# Altium PCB Copy of EVB_gate driver_components.PcbDoc
Units mil, origin at the board's own origin, x right, y up, seen from the top; angles counter-clockwise.
Board outline 1180 x 1310 mil, 2 copper layers (Top Layer, Bottom Layer); 26 components, 19 nets, 81 pads, 0 vias.
Unrouted connection lines stored in the file: 57.
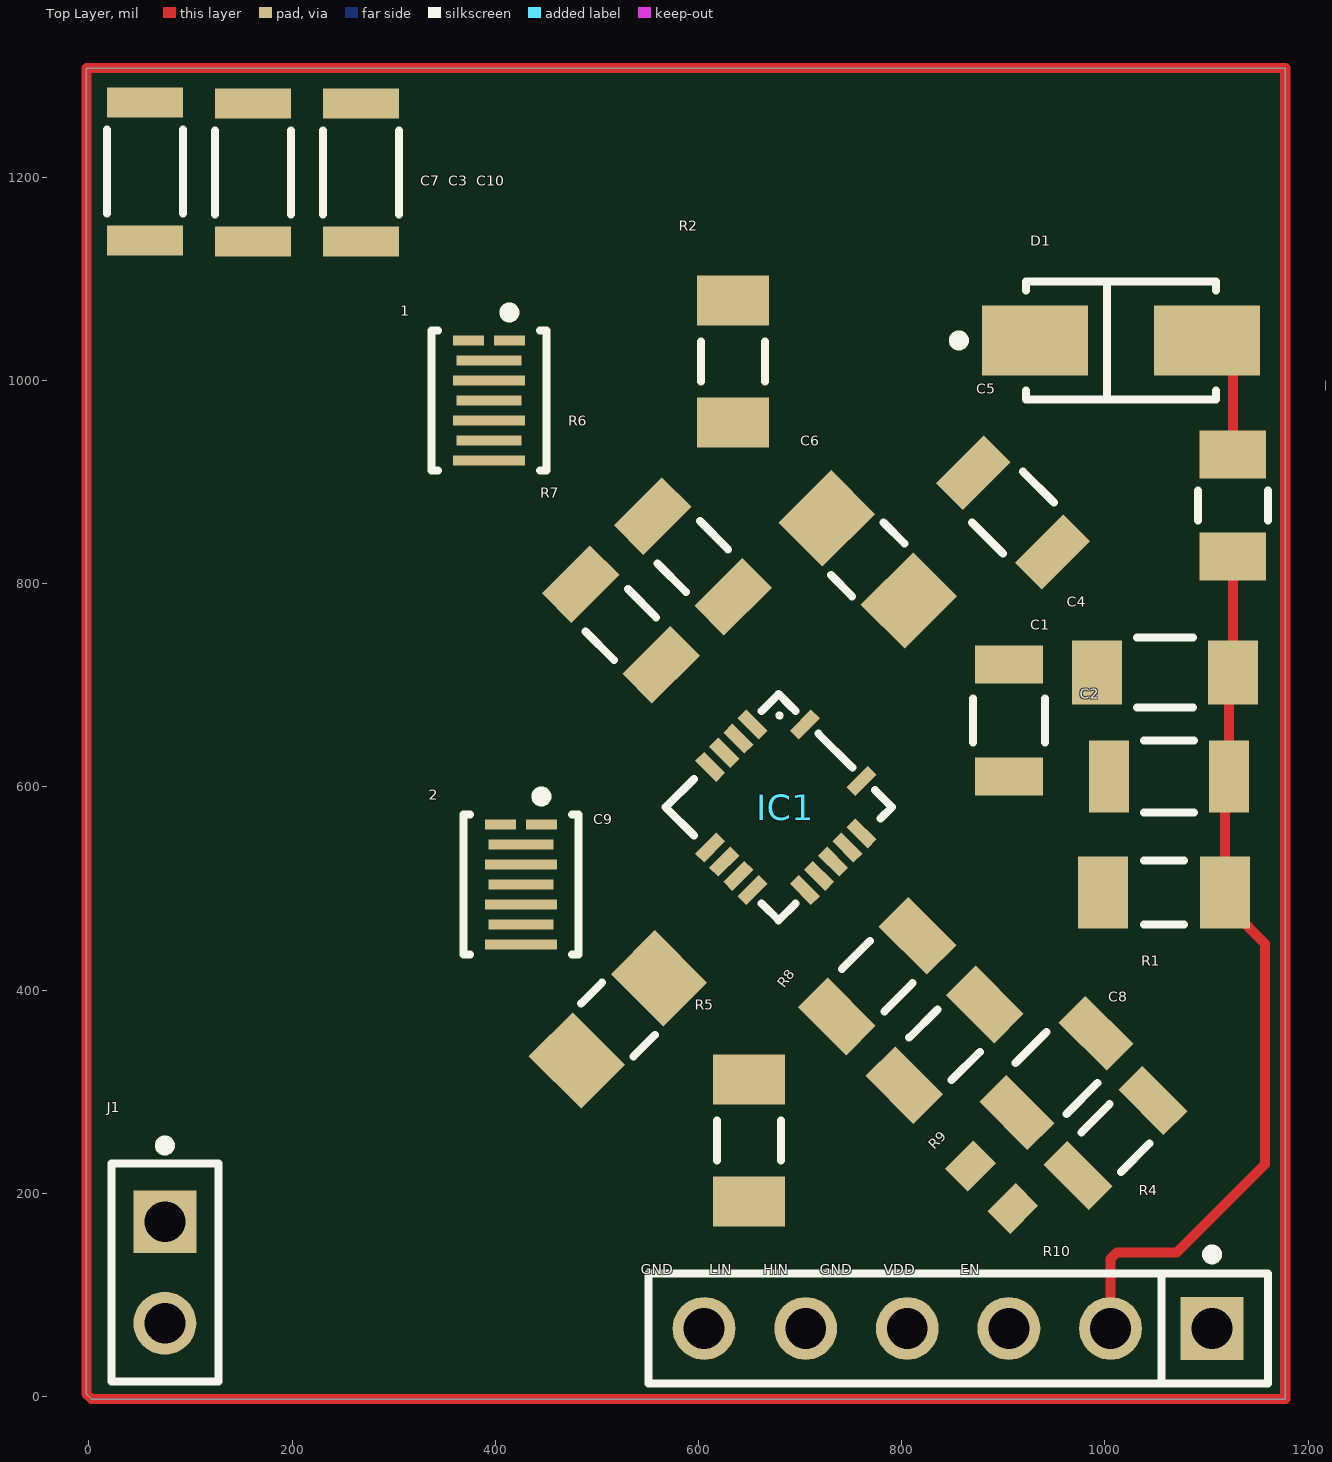
[diagram p0: Top Layer view]
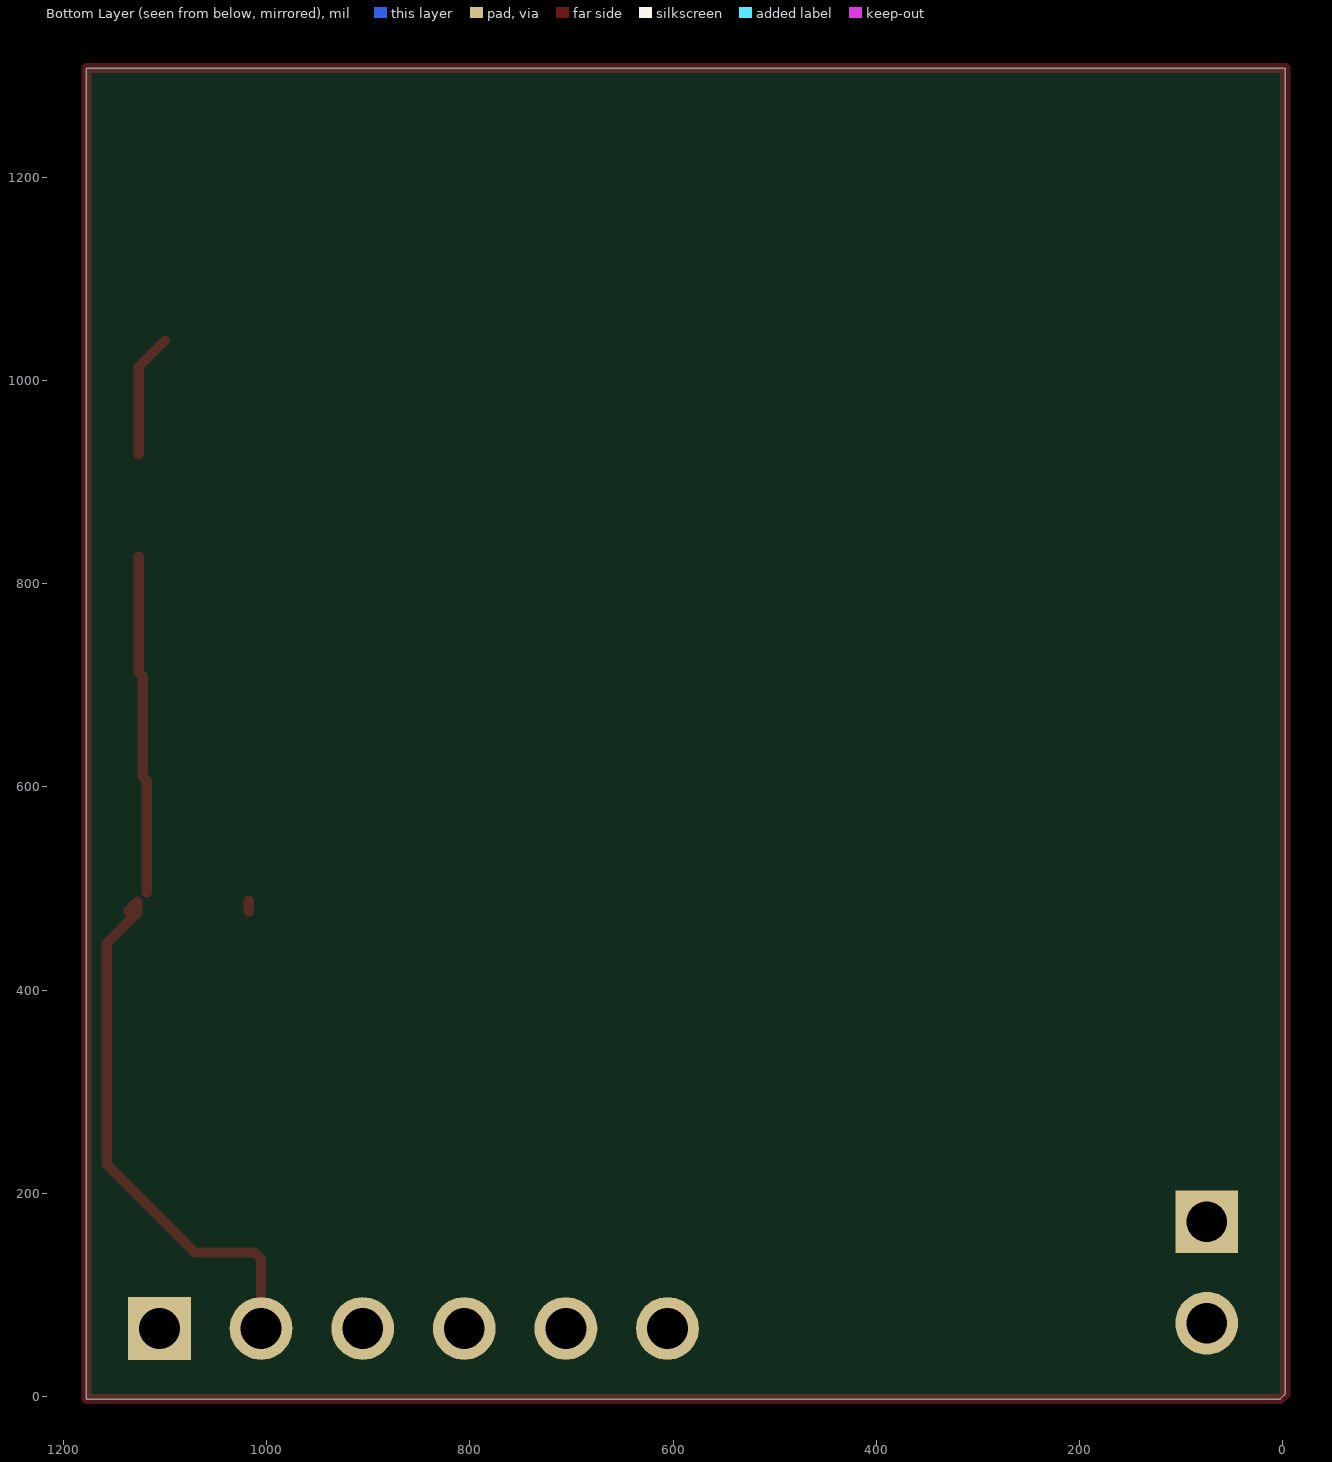
[diagram p1: Bottom Layer view, seen from below]

## Layer stack, top to bottom
Top Solder: solder mask 0.4, Solder Resist, Dk 3.5
Top Layer: signal copper 1.4
Dielectric 1: dielectric 12.6, FR-4, Dk 4.8
Bottom Layer: signal copper 1.4
Bottom Solder: solder mask 0.4, Solder Resist, Dk 3.5

## Board outline
1177.5,-2.5 1177.5,1307.5 -2.5,1307.5 -2.5,2.5 2.5,-2.5

## Design rules (kind name [scope] priority, off if disabled: settings)
Clearance [All] p1: gap=10 ignorepadtopadclearanceinfootprint=FALSE
PolygonConnect [All] p1: connectstyle=Relief reliefconductorwidth=10 reliefentries=4 polygonreliefangle="90 Angle" airgapwidth=10
RoutingVias [All] p1: holewidth=28 width=50 viastyle="Through Hole" minholewidth=28 minwidth=50 maxholewidth=28 maxwidth=50
SolderMaskExpansion [All] p1: expansion=4 istentingtop=FALSE
SupplyNets "Schematic Supply Nets" [InNet('GND')] p1: voltage=0.000
Width [All] p1: maxlimit=10 minlimit=10 preferedwidth=10
30 further rules are at their usual default settings.

## Components (designator, comment, footprint, x,y, rotation, side; value= is the part's Value field where it differs from the comment)
1 "GAN3R2-100CBE" FP-WLCSP8-SOT8072-MFG 393.7,980.31 r270 top
2 "GAN3R2-100CBE" FP-WLCSP8-SOT8072-MFG 425.2,503.94 r270 top
C1 "10PF" FP-C1206C-EB-MFG 905.51,665.35 r270 top value="10 pF"
C2 "1uF" FP-CC1206-1_25-MFG 1062.99,610.24 r180 top value="1 uF"
C3 "50u" FP-CGA5L-0_3-0_1-IPC_B 161.42,1204.72 r90 top
C4 "100nF" FP-1206-L_3_2_0_15-W_1_6-MFG 1059.06,712.6 r0 top
C5 "470uF" FP-C1206C-EB-MFG 909.45,870.08 r315 top value="0.47 μF"
C6 "1uF" FP-1206-L_3_2_0_15-W_1_6-IPC_A 766.68,823.87 r315 top
C7 "100uF" FP-CGA5L-0_3-0_1-IPC_B 55.12,1205.71 r90 top
C8 "0.1uF" FP-C1206C-EB-MFG 952.36,318.5 r45 top value="0.10 μF"
C9 "1uF" FP-1206-L_3_2_0_15-W_1_6-IPC_A 520.72,371.11 r45 top
C10 "10u" FP-CGA5L-0_3-0_1-IPC_B 267.72,1204.72 r90 top
D1 "ES1J" FP-403AE-MFG 1015.75,1039.37 r0 top value=10pF
"GND        LIN       HIN       GND       VDD          EN" "" FP-22-28-4060-MFG 855.51,66.93 r180 top (schematic designator Connector)
IC1 "NCP51820" NCP51820 678.97,579.99 r315 top
J1 "TSW-102-07-F-S" FP-TSW-102-07-F-S-MFG 74.8,122.05 r270 top
R1 "10K" RESC3116X65X40ML10T20 1058.07,496.06 r180 top
R2 "10" RESC3116X65X40ML10T20 633.86,1018.7 r270 top
R3 "2.0" FP-RMCF1206-IPC_C 1125.98,876.99 r270 top
R4 "60.4" RESC3116X65X40LL10T20 1010.36,254.45 r45 top
R5 "10" RESC3116X65X40ML10T20 649.61,251.97 r90 top
R6 "10" RESC3116X65X40NL10T20 594.49,826.77 r315 top
R7 "2.0" RESC3116X65X40NL10T20 523.62,759.84 r315 top
R8 "10" RESC3116X65X40NL10T20 775.89,413.69 r225 top
R9 "2.0" RESC3116X65X40NL10T20 842.22,346.16 r225 top
R10 "0" RESC1608X55X25ML10T15 888.57,205.92 r315 top

## Footprints (in the part's own frame and the unit in brackets; to place one, negate y for a bottom-side part, rotate by r counter-clockwise, add the part's x,y. Pads: shape width x height; smd on the part's side, far side on the other; paste and mask are expansions set on the pad)
FP-22-28-4060-MFG [mm]
  rect 1.57x1.57 hole 1.02 paste-2539.97 mask+0: 1(-6.35,0)
  round 1.57 hole 1.02 paste-2539.97 mask+0: 2(-3.81,0) 3(-1.27,0) 4(1.27,0) 5(3.81,0) 6(6.35,0)
  silkscreen extent -7.75,-1.97 7.75,1.37, body extent -7.85,-1.47 7.85,1.47, height 0.25
FP-403AE-MFG [mm]
  rect 2.65x1.75 smd paste+0 mask+0: 1(-2.15,0) 2(2.15,0)
  silkscreen extent -4.17,-1.48 2.37,1.48, body extent -3.57,-1.58 3.57,1.58, height 0.25
FP-1206-L_3_2_0_15-W_1_6-IPC_A [mil]
  rect 61.24x73.16 smd paste+0 mask+0: 1(-57.14,0) 2(57.14,0)
  silkscreen extent -15,-37 15,37, body extent -107,-56 107,56, height 10
FP-1206-L_3_2_0_15-W_1_6-MFG [mm]
  rect 1.25x1.6 smd paste+0 mask+0: 1(-1.7,0) 2(1.7,0)
  silkscreen extent -0.7,-0.87 0.7,0.87, body extent -2.42,-0.97 2.42,0.97, height 0.25
FP-C1206C-EB-MFG [mm]
  rect 0.95x1.7 smd paste+0 mask+0: 1(-1.4,0) 2(1.4,0)
  silkscreen extent -0.55,-0.9 0.55,0.9, body extent -2,-1 2,1, height 0.25
FP-CC1206-1_25-MFG [mm]
  rect 1x1.8 smd paste+0 mask+0: 1(-1.5,0) 2(1.5,0)
  silkscreen extent -0.63,-0.9 0.63,0.9, body extent -2.2,-1.25 2.2,1.25, height 0.25
FP-CGA5L-0_3-0_1-IPC_B [mm]
  rect 0.756x1.906 smd paste+0 mask+0: 1(-1.725,0) 2(1.725,0)
  silkscreen extent -1.05,-0.95 1.05,0.95, body extent -2.35,-1.2 2.35,1.2, height 0.25
FP-RMCF1206-IPC_C [mil]
  rect 47.39x65.28 smd paste+0 mask+0: 1(-50.22,0) 2(50.22,0)
  silkscreen extent -15,-34 15,34, body extent -78,-38 78,38, height 10
FP-TSW-102-07-F-S-MFG [mm]
  rect 1.57x1.57 hole 1.02 paste-2539.97 mask+0: 1(-1.27,0)
  round 1.57 hole 1.02 paste-2539.97 mask+0: 2(1.27,0)
  silkscreen extent -3.3,-1.34 2.73,1.34, body extent -2.83,-1.44 2.83,1.44, height 0.25
FP-WLCSP8-SOT8072-MFG [mm]
  rect 0.25x0.77 smd paste-1000 mask+0: 1(-1.5,0.512) 2(-1.5,-0.513)
  rect 0.25x1.62 smd paste-1000 mask+0: 3(-1,0) 5(0,0) 7(1,0)
  rect 0.25x1.8 smd paste-1000 mask+0: 4(-0.5,0) 6(0.5,0) 8(1.5,0)
  silkscreen extent -2.32,-1.44 1.75,1.44, body extent -1.85,-1.17 1.85,1.17, height 0.25
NCP51820 [mm]
  rect 0.75x0.32 smd: 1(-1.925,1) 2(-1.925,0.5) 3(-1.925,0) 4(-1.925,-0.5) 9(1.925,-1) 10(1.925,-0.5) 11(1.925,0) 12(1.925,0.5) 13(1.925,1)
  rect 0.32x0.75 smd: 5(-0.5,-1.925) 6(0,-1.925) 7(0.5,-1.925) 8(1,-1.925) 14(1,1.925) 15(-1,1.925)
  silkscreen extent -2,-2 2,2, body extent -1.84,-2.14 2.2,1.9, height 0.89
RESC1608X55X25ML10T15 [mm] "Chip Resistor, 2-Leads, Body 1.60x0.80mm, IPC Low Density"
  rect 0.8x1 smd: 1(-0.75,0) 2(0.75,0)
  body extent -0.85,-0.45 0.85,0.45, height 0.55
RESC3116X65X40LL10T20 [mm] "Chip Resistor, 2-Leads, Body 3.10x1.60mm, IPC High Density"
  rect 0.85x1.6 smd: 1(-1.325,0) 2(1.325,0)
  silkscreen extent -0.5,-0.7 0.5,0.7, body extent -1.6,-0.85 1.6,0.85, height 0.65
RESC3116X65X40ML10T20 [mm] "Chip Resistor, 2-Leads, Body 3.10x1.60mm, IPC Low Density"
  rect 1.25x1.8 smd: 1(-1.525,0) 2(1.525,0)
  silkscreen extent -0.5,-0.8 0.5,0.8, body extent -1.6,-0.85 1.6,0.85, height 0.65
RESC3116X65X40NL10T20 [mm] "Chip Resistor, 2-Leads, Body 3.10x1.60mm, IPC Medium Density"
  rect 1.05x1.7 smd: 1(-1.425,0) 2(1.425,0)
  silkscreen extent -0.5,-0.75 0.5,0.75, body extent -1.6,-0.85 1.6,0.85, height 0.65

## Part data
1 2: library part GAN3R2-100CBE_1, "GAN3R2-100CBE                                                                                                                                                                                                                                                     100 V, 3.2 mOhm Gallium Nitride (GaN) FET in a 3.5 mm x 2.13 mm Wafer Level Chip", Continuous Drain Current (ID)=60A, Drain to Source Breakdown Voltage=100V, Drain to Source Resistance=2.4mΩ, Gate to Source Voltage (Vgs)=-4V, Max Junction Temperature (Tj)=150°C, Min Operating Temperature=-40°C, Power Dissipation=394W, Drain to Source Voltage (Vdss)=100V, Height=464µm, Max Operating Temperature=150°C, MPN=GAN3R2-100CBE, NexarPartId=136220986, Number of Channels=1
C1: library part CMP-1037-00647-2, "CAP CER 10PF 50V C0G/NP0 1206", Capacitance="10 pF", Manufacturer=KEMET, Manufacturer Part Number=C1206C100J5GACTU, Package=C1206C-EB, Temperature="-55°C to +150°C", Temperature Characteristic=C0G, Temperature Coefficient=15%, Temperature Range High=+150°C, Temperature Range Low=-55°C, Tolerance=0.05, Voltage Rating="50 V", Automotive=Yes, Automotive Grade="Grade 0", Category=Cap, ComponentLink2Description=Datasheet, ComponentLink2URL=https://content.kemet.com/datasheets/KEM_C1007_X8R_ULTRA_150C_SMD.pdf, Device Class L1="Passive Components", Device Class L2=Capacitors, Device Class L3="Ceramic Capacitors", Digikey Description="CAP CER 10PF 50V C0G/NP0 1206", Height=0.88mm, Ipc Land Pattern Name=CAPC320160X78, Lead Free=Yes, Material=Ceramic, Mouser Description="Multilayer Ceramic Capacitors MLCC - SMD/SMT 50volts 10pF C0G 5%", Octopart=https://octopart.com/c1206c100j5gactu-kemet-87062, RoHS=TRUE
C2: library part CMP-1037-04701-3, "CAP CER 1UF 25V X7R 1206", Capacitance="1 uF", Manufacturer=Yageo, Manufacturer Part Number=CC1206KKX7R8BB105, Package=CC1206-1.25, Temperature="-55°C to +125°C", Temperature Characteristic=X7R, Temperature Coefficient=15%, Temperature Range High=+125°C, Temperature Range Low=-55°C, Tolerance=0.1, Voltage Rating="25 V", Automotive=No, Automotive Grade=NA, Category=Cap, ComponentLink2Description=Datasheet, ComponentLink2URL=http://www.yageo.com/documents/recent/UPY-NP0X7R_HV_1KV-to-3KV_11.pdf, Device Class L1="Passive Components", Device Class L2=Capacitors, Device Class L3="Ceramic Capacitors", Digikey Description="CAP CER 1UF 25V X7R 1206", Footprint Url=http://www.yageo.com/exep/pages/download/literatures/UPY-C_GEN_24.pdf, Height=1.45mm, Lead Free=Yes, Material=Ceramic, Mouser Description="Surface Mount Ceramic Multilayer Capacitor 1uF 10% X7R 25V 1206 Blister T/R", Octopart=https://octopart.com/cc1206kkx7r8bb105-yageo-11543785, RoHS=TRUE
C3 C7 C10: library part CMP-08246-001673-1, "Cap Ceramic 100nF 450V X7T 10% Pad SMD 1206 +125°C Automotive T/R", Capacitance=100nF, Case Code (Imperial)=1206, Case Code (Metric)=3216, Dielectric=X7T, Max Operating Temperature=125°C, Min Operating Temperature=-55°C, Package Quantity=1, Ratings=AEC-Q200, Tolerance=10%, Voltage Rating=450V, Case/Package=1206, Depth=1.6mm, Features="Soft Termination", Height=1.6mm, Lead Free="Lead Free", Length=3.2mm, Mount="Surface Mount", Packaging="Tape and Reel", REACH SVHC="No SVHC", Termination=SMD/SMT, Thickness=0.075inch, Voltage Rating (DC)=450V, Weight=0.000571oz, Width=0.063inch
C4: library part CMP-14477-000033-2, "None", RoHS Compliant=Yes
C5: library part CMP-1037-04557-2, "CAP CER 0.47UF 25V X5R 1206", Capacitance="0.47 μF", Manufacturer=KEMET, Manufacturer Part Number=C1206C474K3PACTU, Package=C1206C-EB, Temperature="-55°C to +150°C", Temperature Characteristic=X5R, Temperature Coefficient=15%, Temperature Range High=+150°C, Temperature Range Low=-55°C, Tolerance=0.1, Voltage Rating="25 V", Automotive=Yes, Automotive Grade="Grade 0", Category=Cap, ComponentLink2Description=Datasheet, ComponentLink2URL=https://content.kemet.com/datasheets/KEM_C1007_X8R_ULTRA_150C_SMD.pdf, Device Class L1="Passive Components", Device Class L2=Capacitors, Device Class L3="Ceramic Capacitors", Digikey Description="CAP CER 0.47UF 25V X5R 1206", Height=0.88mm, Ipc Land Pattern Name=CAPC320160X78, Lead Free=Yes, Material=Ceramic, Mouser Description="Multilayer Ceramic Capacitors MLCC - SMD/SMT 25volts 0.47uF X5R 10%", Octopart=https://octopart.com/c1206c474k3pactu-kemet-16430430, RoHS=TRUE
C6 C9: library part CMP-14477-003409-2, "None", Case Code (Imperial)=1206, Case Code (Metric)=3216, Dielectric=X5R, Max Operating Temperature=85°C, Min Operating Temperature=-55°C, Package Quantity=1, Resistor Type=Ceramic, Tolerance=10%, Voltage=25V, Capacitance=1uF, Case/Package=1206, Construction=Flat, Depth=1.6mm, Halogen Free="Halogen Free", Height=0.85mm, Lead Free="Lead Free", Length=3.2mm, Mount="Surface Mount", Number of Pins=2, Packaging="Tape and Reel", Radiation Hardening=No, RoHS Compliant=Yes, Series=M, Termination=SMD/SMT, Thickness=0.037inch, Voltage Rating=25V, Voltage Rating (DC)=25V, Width=0.063inch
C8: library part CMP-03020-001014-1, "CAP CER 0.1UF 25V 10% X7R 1206", Capacitance="0.10 μF", Manufacturer=KEMET, Manufacturer Part Number=C1206C104K3RACTU, Package=C1206C-EB, Temperature="-55°C to +150°C", Temperature Characteristic=X7R, Temperature Coefficient=15%, Temperature Range High=+150°C, Temperature Range Low=-55°C, Tolerance=0.1, Voltage Rating="25 V", Automotive=Yes, Automotive Grade="Grade 0", Category=Cap, ComponentLink2Description=Datasheet, ComponentLink2URL=https://content.kemet.com/datasheets/KEM_C1007_X8R_ULTRA_150C_SMD.pdf, Device Class L1="Passive Components", Device Class L2=Capacitors, Device Class L3="Ceramic Capacitors", Digikey Description="CAP CER 0.1UF 25V 10% X7R 1206", Height=0.88mm, Ipc Land Pattern Name=CAPC320160X78, Lead Free=Yes, Material=Ceramic, Mouser Description="CAP CER 0.1UF 25V X7R 1206", Octopart=https://octopart.com/c1206c104k3ractu-kemet-9144317, RoHS=TRUE
D1: library part CMP-07163-000025-1, "DIODE GEN PURP 400V 1A SMA", Capacitance=10pF, Forward Current=1A, Manufacturer="ON Semiconductor", Manufacturer Part Number=ES1G, Max Junction Temp=+150°C, Max Repetitive Reverse Voltage=400V, Max Surge Forward Current=30A, Package=403AE, Peak Reverse Current=5uA, Temperature="to +150°C", Automotive=No, Category=Diode, ComponentLink2Description=Datasheet, ComponentLink2URL=https://www.onsemi.com/pub/Collateral/ES1J-D.PDF, Device Class L1="Discrete Semiconductors", Device Class L2=Diodes, Device Class L3="Rectifier Diodes", Digikey Description="DIODE GEN PURP 400V 1A SMA", Footprint Url=https://www.onsemi.com/pub/Collateral/403AE.PDF, Height=2.5mm, Lead Free=Yes, Mouser Description="Rectifiers 1.0 A Ultra Fast Recovery Rect", MPN=ES1J, Octopart=https://octopart.com/es1g-on+semiconductor-84324858, RoHS=TRUE, Standoff Height=0.05mm, Temperature Range High=+150°C
"GND        LIN       HIN       GND       VDD          EN": library part CMP-04776-000763-1, "CONN HEADER VERT 6POS 2.54MM", Color=Black, Contact Resistance=20mR, Current Rating=4A, Max Operating Temperature=75°C, Max Voltage Rating (AC)=250V, Max Voltage Rating (DC)=250.25kV, Min Operating Temperature=0°C, MPN=22-28-4060, Package Quantity=1, Connector Type="Male Pin", Contact Material=Brass, Contact Mating Length=0.24inch, Contact Plating=Tin, Contact Type="Male Pin", Depth=2.49mm, Gender=Male, Housing Color=Black, Housing Material=Thermoplastic, Length=15.24mm, Mount="Through Hole", Number Of Contacts=6, Number of Positions=6, Number Of Rows=1, Orientation=Straight, Packaging=Bulk, Pitch=2.54mm, RoHS Compliant=Yes, Series="KK® 42375", Termination=Solder, Voltage Rating=250V
IC1: "Integrated Circuit", Manufacturer_Name=onsemi, Mouser Part Number=N/A, Datasheet Link=https://www.onsemi.com/download/data-sheet/pdf/ncp51820-d.pdf, Height=0.9mm, Manufacturer_Part_Number=NCP51820, Mouser Price/Stock=https://www.mouser.co.uk/ProductDetail/onsemi/NCP51820?qs=vEM7xhTegWhaPMdkL3AwCA%3D%3D, MPN=NCP51820
J1: library part CMP-02766-001458-1, "CONN HEADER VERT 2POS 2.54MM", Color=Black, Flammability Rating="UL94 V-0", Max Current Rating=7.6A, Max Operating Temperature=125°C, Max Voltage Rating (AC)=550V, Min Operating Temperature=-55°C, Package Quantity=1, Connector Type=Header, Contact Finish - Mating=GOLD, Contact Material=Bronze, Contact Mating Length=0.23inch, Contact Plating=Gold, Contact Shape=Square, Contact Type="Male Pin", Depth=2.54mm, Fastening Type=Pull, Gender=Male, Housing Color=Black, Housing Material=Polyester, Insulation Color=Black, Insulation Material=PBT, Length=5.08mm, Mount="Through Hole", Number Of Contacts=2, Number of Positions=2, Number Of Rows=1, Orientation=Straight, Packaging=Bulk, Pitch=2.54mm, Radiation Hardening=No, REACH SVHC="No SVHC", RoHS Compliant=Yes, Series=TSW, Termination=Solder
R1 R2 R5: library part CMP-1014-00623-2, "Chip Resistor, 10 KOhm, +/- 1%, 0.25 W, -55 to 155 degC, 1206 (3216 Metric), RoHS, Tape and Reel", Case Code (Imperial)=1206, Case Code (Metric)=3216, Manufacturer=Yageo, Max Operating Temperature=155degC, Min Operating Temperature=-55degC, Package Description="2-Pin Surface Mount Device, Body 3.1 x 1.6 mm", Package Quantity=5000, Package Reference=1206.0, Power Rating=250mW, Resistance=10KOhm, Temperature Coefficient=100ppm/degreesC, Tolerance=1%, Voltage Rating=200V, Case/Package=1206, Composition=ThickFilm, Datasheet URL=http://www.yageo.com/NewPortal/yageodocoutput?fileName=/pdf/R-Chip/PYu-RC_Group_51_RoHS_L_5.pdf, Datasheet Version="Rev. 5, 10/2016", Depth=1.6mm, Height=0.55mm, Lead Free=LeadFree, Length=3.1mm, Manufacturer URL=http://www.yageo.com/, Military Standard=Not, Packaging=TapeandReel, REACH SVHC=Unknown, RoHSCompliant=true, Termination=SMD/SMT, Width=1.6mm
R3: library part CMP-26527-002749-1, "RES 2 OHM 1% 1/4W 1206", Case Code (Imperial)=1206, Case Code (Metric)=3216, Max Operating Temperature=155°C, Max Power Dissipation=250mW, Min Operating Temperature=-55°C, Package Quantity=5000, Resistance=2R, Resistor Type="Thick Film", Temperature Coefficient=200ppm/°C, Tolerance=1%, Case/Package=1206, Contact Plating=Tin, Features="Automotive AEC-Q200", Height=0.028inch, Lead Free="Lead Free", Length=0.126inch, Mount="Surface Mount", Number of Terminations=2, Packaging="Tape and Reel", Radiation Hardening=No, RoHS Compliant=Yes, Series=RMCF, Width=0.063inch
R4: library part CMP-2003-03498-1, Manufacturer=Yageo, Part Number=RC1206FR-1360R4L
R6 R8: library part CMP-2003-04941-1, Manufacturer=Yageo, Part Number=RC1206FR-1310RL
R7 R9: library part CMP-2003-03966-1, Manufacturer=Yageo, Part Number=RC1206JR-072RL
R10: library part CMP-2100-03667-1, "Chip Resistor, 0 Ohm, +/- 5%, 0.1 W, -55 to 155 degC, 0603 (1608 Metric), RoHS, Tape and Reel", Case Code (Imperial)=0603, Case Code (Metric)=1608, Manufacturer=Yageo, Max Operating Temperature=155degC, Min Operating Temperature=-55degC, MPN=RC0603JR−070RL, Package Description="2-Pin Surface Mount Device, Body 1.6 x 0.8 mm", Package Quantity=5000, Power Rating=100mW, Resistance=0mOhm, Temperature Coefficient=200ppm/degreesC, Tolerance=5%, Voltage Rating=50V, Case/Package=0603, Composition=ThickFilm, Contact Plating=Tin, Datasheet URL=http://www.yageo.com/NewPortal/yageodocoutput?fileName=/pdf/R-Chip/PYu-RC_Group_51_RoHS_L_5.pdf, Datasheet Version="Rev. 5, 10/2016", Depth=0.8mm, Height=0.45mm, Lead Free=LeadFree, Length=1.6mm, Manufacturer URL=http://www.yageo.com/, Military Standard=Not, Number of Pins=2, Package Reference=0603, Packaging=TapeandReel, Radiation Hardening=No, REACH SVHC=NoSVHC, RoHSCompliant=true, Termination=SMD/SMT, Voltage Rating (DC)=50V, Width=0.8mm

## Nets (pads, with @x,y where several pads share a name; then routed paths per layer and width w, separated by ;. In a path a pad name is that pad's centre, name@x,y a point inside that pad or via, vN(x,y) a via of type N, cw(c..) or ccw(c..) an arc to the next point about the centre after c; other vN are vias at no path point)
GND: "GND        LIN       HIN       GND       VDD          EN.3" "GND        LIN       HIN       GND       VDD          EN.6" C1.2 C2.2 C4.1 C8.2 IC1.10 R4.2 R10.2
Net1_1: 1.1 R2.2 R6.1 R7.1
Net1_2: 1.2 1.4 1.6 1.8 2.3 2.5 2.7 C5.1 C6.1 IC1.4 R2.1
Net1_3: 1.3 1.5 1.7 C3.1 C7.1 C10.1 J1.1
Net2_1: 2.1 R5.2 R8.1 R9.1
Net2_2: 2.2 2.4 2.6 2.8 C3.2 C7.2 C9.2 C10.2 IC1.8 J1.2 R5.1 R10.1
NetC1_1: "GND        LIN       HIN       GND       VDD          EN.1" C1.1 IC1.13 R1.2 | length 10.8
  Top Layer w10: R1.2@1017.72,477.36 R1.2@1017.72,488.19
NetC2_1: "GND        LIN       HIN       GND       VDD          EN.2" C2.1 C4.2 IC1.14 R1.1 R3.2 | length 877
  Top Layer w10: 1005.51,66.93 1005.51,135.43 1011.81,141.73 1070.87,141.73 1157.48,228.35 1157.48,445.87 1127.27,476.07 1127.27,486.9 R1.1@1136.43,477.74 ; R1.1 1118.11,606.3 C2.1 1122.05,708.66 C4.2 R3.2
NetC5_2: C5.2 D1.1 IC1.15
NetC6_2: C6.2 IC1.1
NetC8_1: C8.1 IC1.9 R4.1
NetC9_1: C9.1 IC1.5
NetConnector_4: "GND        LIN       HIN       GND       VDD          EN.4" IC1.12
NetConnector_5: "GND        LIN       HIN       GND       VDD          EN.5" IC1.11
NetD1_2: D1.2 R3.1 | length 122.8
  Top Layer w10: D1.2 1125.98,1013.78 R3.1
NetIC1_2: IC1.2 R6.2
NetIC1_3: IC1.3 R7.2
NetIC1_6: IC1.6 R8.2
NetIC1_7: IC1.7 R9.2
copper on no net: | length 4977.1
  Top Layer w10: -2.5,2.5 -2.5,1307.5 1177.5,1307.5 1177.5,-2.5 2.5,-2.5 -2.5,2.5